# Altium PCB PCB1.PcbDoc
Units mil, origin at the board's own origin, x right, y up, seen from the top; angles counter-clockwise.
Board outline 2775 x 1765 mil, 2 copper layers (Top Layer, Bottom Layer); 45 components, 46 nets, 138 pads, 38 vias.
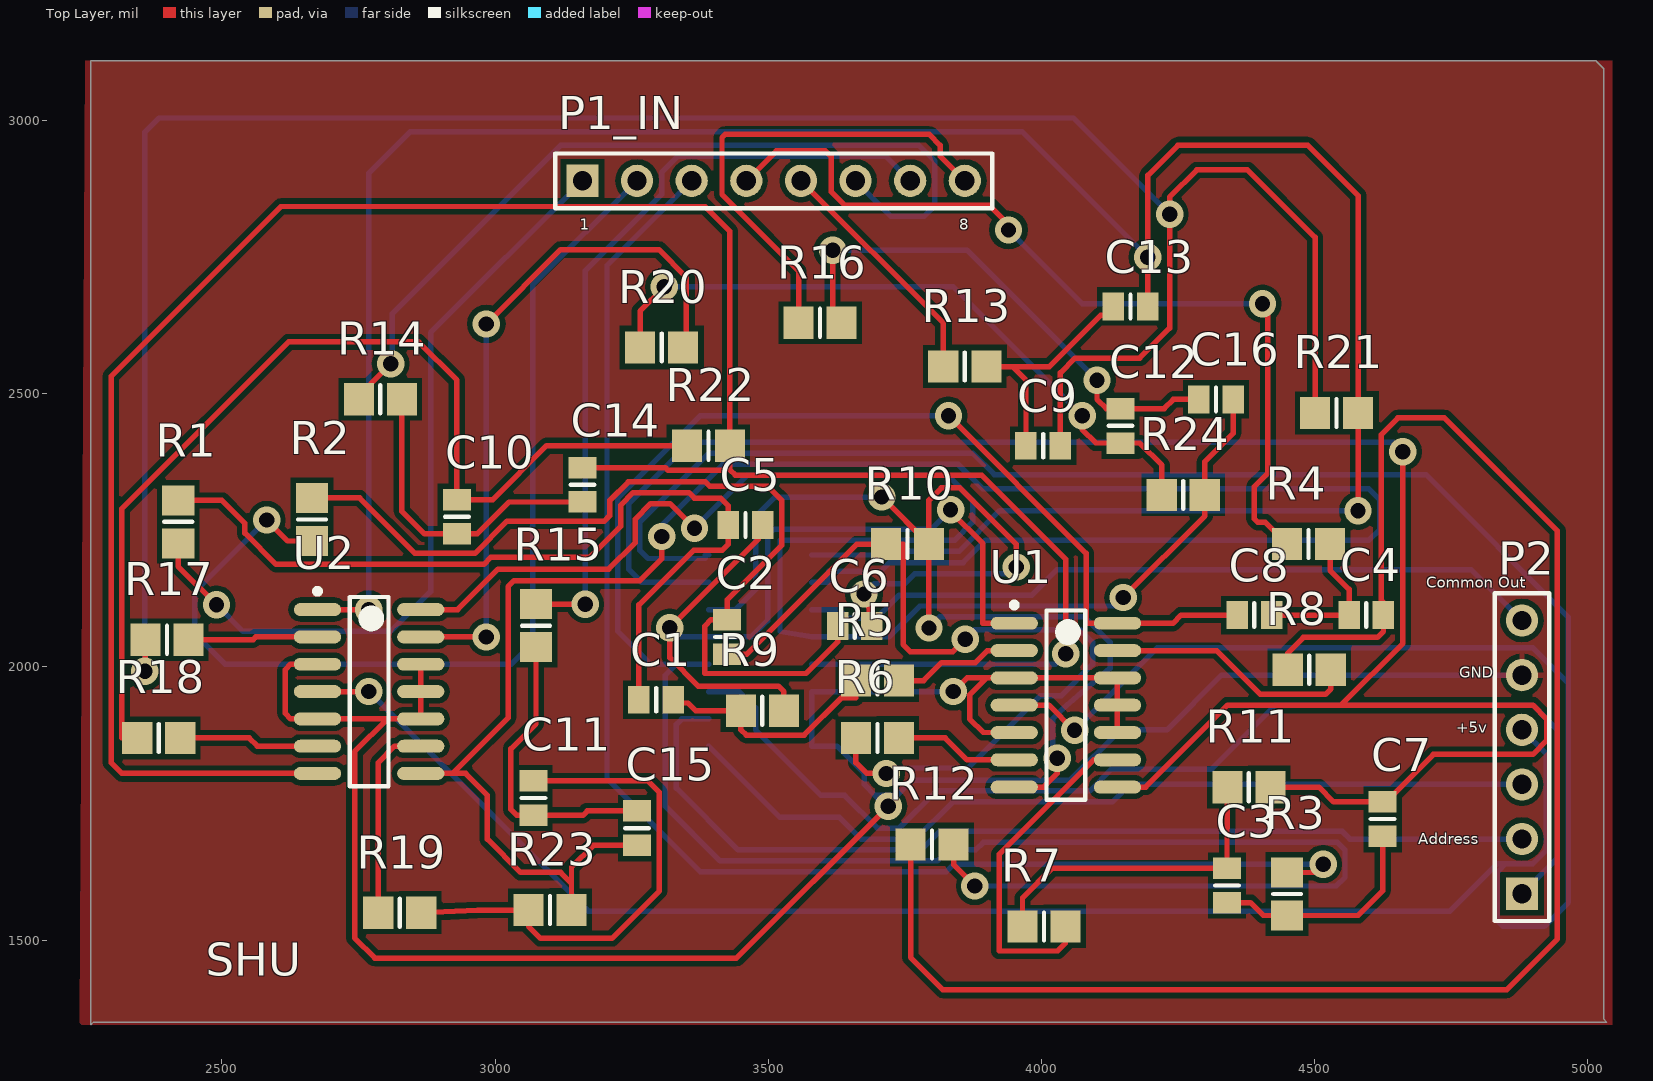
[diagram p0: Top Layer view]
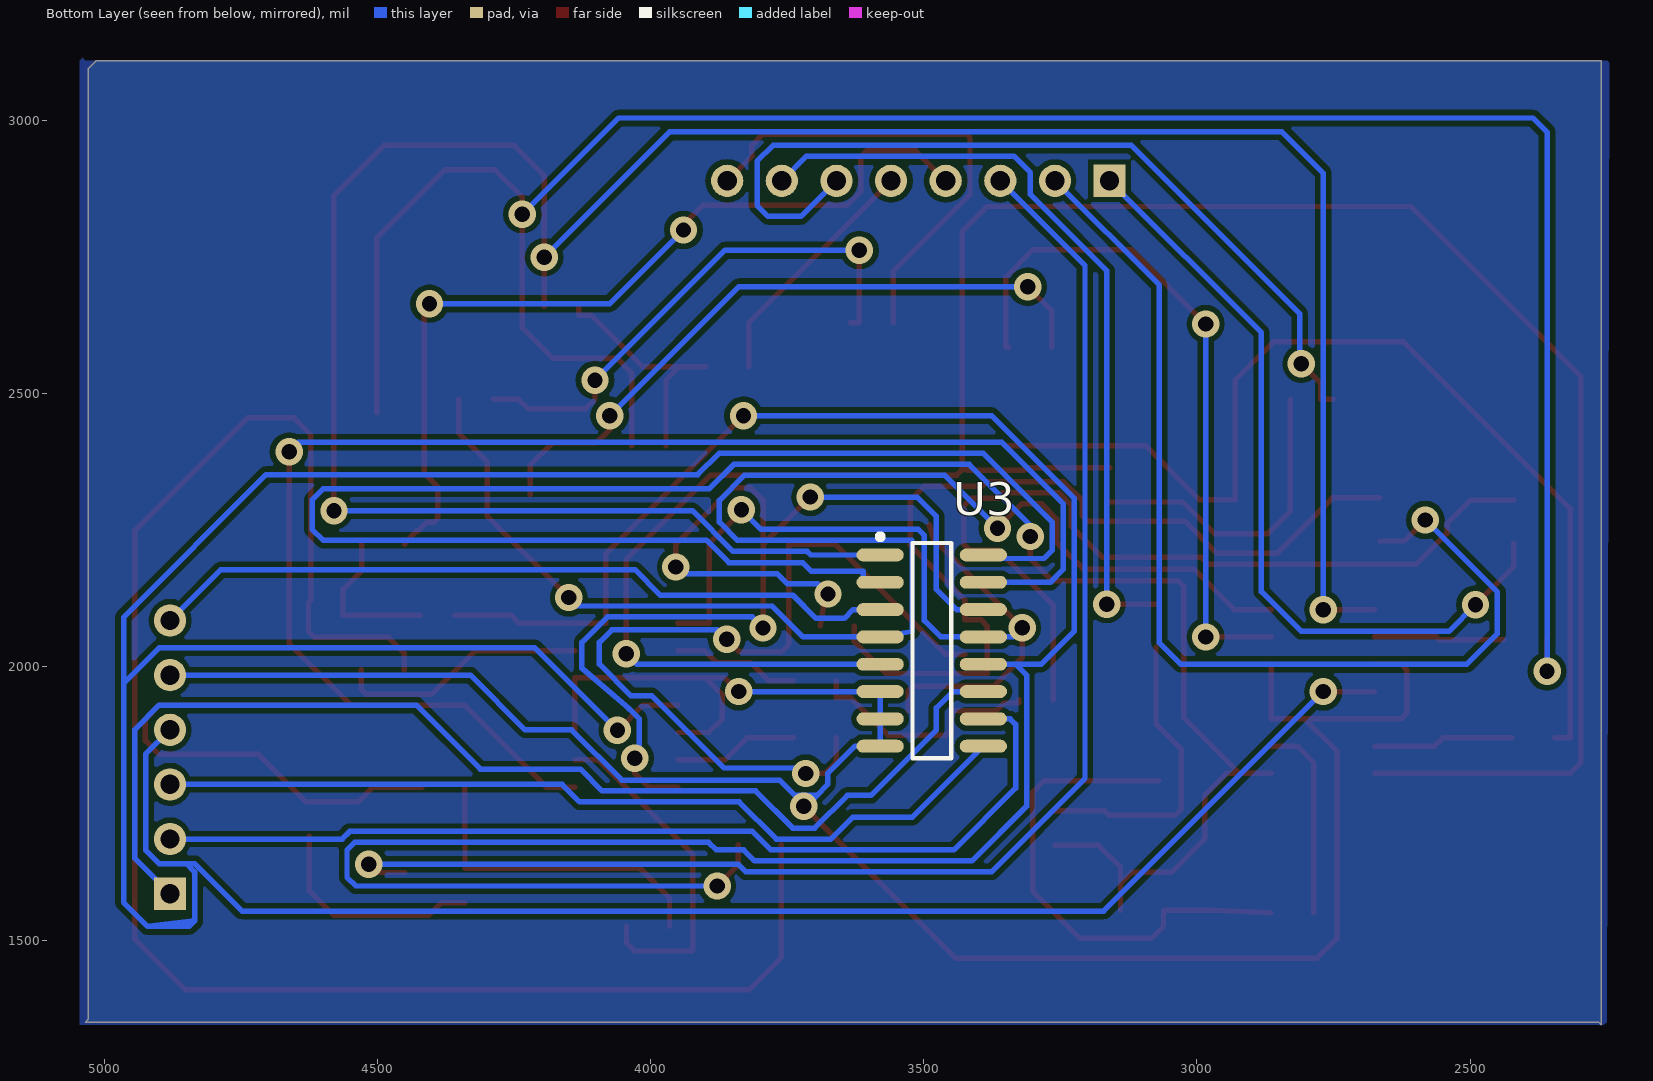
[diagram p1: Bottom Layer view, seen from below]

## Layer stack, top to bottom
Top Solder: solder mask 0.4, Solder Resist, Dk 3.5
Top Layer: signal copper 1.4
Dielectric 1: dielectric 12.6, FR-4, Dk 4.8
Bottom Layer: signal copper 1.4
Bottom Solder: solder mask 0.4, Solder Resist, Dk 3.5

## Board outline
2260,1345 2260,3110 5015,3110 5030,3095 5030,1355 5035,1350 2265,1350

## Design rules (kind name [scope] priority, off if disabled: settings)
Clearance [All] p1: gap=10 ignorepadtopadclearanceinfootprint=FALSE except(0: Arc-Hole Track-Hole SMDPad-Hole THPad-Hole Via-Hole Fill-Hole Poly-Hole Region-Hole Text-Hole)
PolygonConnect [All] p1: connectstyle=Relief reliefconductorwidth=10 reliefentries=4 polygonreliefangle="90 Angle" airgapwidth=10
RoutingVias [All] p1: holewidth=28 width=50 viastyle="Through Hole" minholewidth=28 minwidth=50 maxholewidth=28 maxwidth=50
SolderMaskExpansion [All] p1: expansion=4
Width [All] p1: maxlimit=10 minlimit=10 preferedwidth=10
30 further rules are at their usual default settings.

## Components (designator, comment, footprint, x,y, rotation, side; value= is the part's Value field where it differs from the comment)
C1 "220nF" 6-0805_L 3295,1940 r0 top
C2 "220nF" 6-0805_L 3425,2055 r270 top
C3 "220nF" 6-0805_L 4340,1600 r90 top
C4 "220nF" 6-0805_L 4595,2095 r0 top
C5 "1nF" 6-0805_L 3458.5,2260 r0 top
C6 "1nF" 6-0805_L 3658.5,2075 r0 top
C7 "1nF" 6-0805_L 4625,1721.5 r90 top
C8 "1nF" 6-0805_L 4390,2095 r180 top
C9 "220nF" 6-0805_L 4003.5,2405 r0 top
C10 "220nF" 6-0805_L 2930,2275 r90 top
C11 "220nF" 6-0805_L 3070,1760 r90 top
C12 "220nF" 6-0805_L 4145,2441.5 r270 top
C13 "1nF" 6-0805_L 4163.5,2660 r0 top
C14 "1nF" 6-0805_L 3160,2333.5 r90 top
C15 "1nF" 6-0805_L 3260,1705 r270 top
C16 "1nF" 6-0805_L 4320,2490 r0 top
P1_IN "Header 8" HDR1X8 3160,2890 r0 top (schematic designator P1)
P2 "Header 6" HDR1X6 4880,1585 r90 top
R1 "33" 6-0805_M 2420,2265.63 r90 top
R2 "33" 6-0805_M 2665,2270 r90 top
R3 "33" 6-0805_M 4450,1584.37 r270 top
R4 "33" 6-0805_M 4489.37,2225 r0 top
R5 "1K" 6-0805_M 3700,1975 r0 top
R6 "1K" 6-0805_M 3700,1870 r0 top
R7 "1K" 6-0805_M 4005,1525 r0 top
R8 "1K" 6-0805_M 4490.63,1995 r0 top
R9 "100M" 6-0805_M 3489.37,1920 r0 top
R10 "100M" 6-0805_M 3755,2225 r0 top
R11 "100M" 6-0805_M 4380,1780 r0 top
R12 "100M" 6-0805_M 3800,1675 r0 top
R13 "33" 6-0805_M 3860,2550 r0 top
R14 "33" 6-0805_M 2790,2490 r0 top
R15 "33" 6-0805_M 3075,2075.63 r270 top
R16 "33" 6-0805_M 3595,2630 r0 top
R17 "1K" 6-0805_M 2399.37,2050 r0 top
R18 "1K" 6-0805_M 2384.37,1870 r0 top
R19 "1K" 6-0805_M 2825.63,1550 r180 top
R20 "1K" 6-0805_M 3305,2585 r0 top
R21 "100M" 6-0805_M 4540.63,2465 r0 top
R22 "100M" 6-0805_M 3390.63,2405 r0 top
R23 "100M" 6-0805_M 3100.63,1555 r0 top
R24 "100M" 6-0805_M 4260,2315 r0 top
U1 "LM324ADR" D014_N 4045,1930 r0 top
U2 "LM324ADR" D014_N 2769.49,1955 r0 top
U3 "CD4051BCM" M16A_N 3485.51,2030 r180 bottom

## Footprints (in the part's own frame and the unit in brackets; to place one, negate y for a bottom-side part, rotate by r counter-clockwise, add the part's x,y. Pads: shape width x height; smd on the part's side, far side on the other; paste and mask are expansions set on the pad)
6-0805_L [mm] "Chip Resistor, Body 2.0x1.2mm, IPC High Density"
  rect 1x1.3 smd: 1(-0.8,0) 2(0.8,0)
  silkscreen extent 0,-0.55 0,0.55, body extent -1.07,-0.7 1.07,0.7, height 0.7
6-0805_M [mm] "Chip Resistor, Body 2.0x1.2mm, IPC Low Density"
  rect 1.4x1.5 smd: 1(-1,0) 2(1,0)
  silkscreen extent 0,-0.65 0,0.65, body extent -1.07,-0.7 1.07,0.7, height 0.7
D014_N [mm] "SOIC, 14-Leads, Body 8.7x3.9mm, Pitch 1.27mm, IPC Medium Density"
  oval 2.2x0.6 smd: 1(-2.4,3.81) 2(-2.4,2.54) 3(-2.4,1.27) 4(-2.4,0) 5(-2.4,-1.27) 6(-2.4,-2.54) 7(-2.4,-3.81) 8(2.4,-3.81) 9(2.4,-2.54) 10(2.4,-1.27) 11(2.4,0) 12(2.4,1.27) 13(2.4,2.54) 14(2.4,3.81)
  silkscreen extent -2.52,-4.4 0.9,4.78, body extent -2,-4.38 2,4.38, height 1.75
HDR1X6 [mm] "Connector; Header; 6 Position"
  rect 1.5x1.5 hole 0.9: 1(0,0)
  round 1.5 hole 0.9: 2(2.54,0) 3(5.08,0) 4(7.62,0) 5(10.16,0) 6(12.7,0)
  silkscreen extent -1.27,-1.27 13.97,1.27
HDR1X8 [mm] "Connector; Header; 8 Position"
  rect 1.5x1.5 hole 0.9: 1(0,0)
  round 1.5 hole 0.9: 2(2.54,0) 3(5.08,0) 4(7.62,0) 5(10.16,0) 6(12.7,0) 7(15.24,0) 8(17.78,0)
  silkscreen extent -1.27,-1.27 19.05,1.27
M16A_N [mm] "SOIC, 16-Leads, Body 9.9x3.9mm, Pitch 1.27mm, IPC Medium Density"
  oval 2.2x0.6 smd: 1(-2.4,4.445) 2(-2.4,3.175) 3(-2.4,1.905) 4(-2.4,0.635) 5(-2.4,-0.635) 6(-2.4,-1.905) 7(-2.4,-3.175) 8(-2.4,-4.445) 9(2.4,-4.445) 10(2.4,-3.175) 11(2.4,-1.905) 12(2.4,-0.635) 13(2.4,0.635) 14(2.4,1.905) 15(2.4,3.175) 16(2.4,4.445)
  silkscreen extent -2.53,-5 0.9,5.42, body extent -2,-5 2,5, height 1.75

## Part data
C1 C2 C3 C4 C5 C6 C7 C8 C9 C10 C11 C12 C13 C14 C15 C16: library part CAP, "电容"
P1_IN: "Header, 8-Pin", LatestRevisionDate=17-Jul-2002, LatestRevisionNote="Re-released for DXP Platform.", Publisher="Altium Limited"
P2: "Header, 6-Pin", LatestRevisionDate=17-Jul-2002, LatestRevisionNote="Re-released for DXP Platform.", Publisher="Altium Limited"
R1 R2 R3 R4 R5 R6 R7 R8 R9 R10 R11 R12 R13 R14 R15 R16 R17 R18 R19 R20 R21 R22 R23 R24: library part RES, "电阻"
U1 U2: "Quadruple Operational Amplifier", Code_IPC=SOIC127P600-14, ComponentLink1Description="Manufacturer Link", ComponentLink1URL=http://www.ti.com/, ComponentLink2Description=Datasheet, ComponentLink2URL=http://www-s.ti.com/sc/ds/lm324.pdf, DatasheetVersion=Jan-1989, LatestRevisionDate=13-Apr-2006, LatestRevisionNote="IPC-7351 Footprint Added.", PackageDescription="14-Pin Small Outline Integrated Circuit 1.27 mm Pitch", PackageReference=D014, PackageVersion=Jan-1998, Published=15-Apr-2002, Publisher="Altium Limited"
U3: "8-Channel Analog Multiplexer/Demultiplexer", Code_IPC=SOIC127P600-16, ComponentLink1Description="Manufacturer Link", ComponentLink1URL=http://www.fairchildsemi.com/, ComponentLink2Description=Datasheet, ComponentLink2URL=http://www.fairchildsemi.com/ds/CD%2FCD4052BC.pdf, DatasheetVersion=Jan-1999, LatestRevisionDate=13-Apr-2006, LatestRevisionNote="IPC-7351 Footprint Added.", PackageDescription="16-Pin Small Outline Integrated Circuit 1.27 mm Pitch", PackageReference=M16A, PackageVersion=2000, Published=17-Jul-2002, Publisher="Altium Limited"

## Via types
v1: diameter 50, hole 28, Top Layer to Bottom Layer, 38 vias

## Nets (pads, with @x,y where several pads share a name; then routed paths per layer and width w, separated by ;. In a path a pad name is that pad's centre, name@x,y a point inside that pad or via, vN(x,y) a via of type N, cw(c..) or ccw(c..) an arc to the next point about the centre after c; other vN are vias at no path point)
+5: 
Address_A: 
Address_B: 
Address_C: 
Channel_1: 
Channel_2: 
Channel_3: 
Channel_4: 
Channel_5: 
Channel_6: 
Channel_7: 
Channel_8: 
Common_Out: 
GND: P2.5
In_1: 
In_2: 
In_3: 
In_4: 
In_5: 
In_6: 
In_7: 
In_8: 
NetC1_1: 
NetC1_2: 
NetC2_1: 
NetC2_2: 
NetC3_1: 
NetC3_2: 
NetC4_1: 
NetC4_2: 
NetC9_1: 
NetC9_2: 
NetC10_1: 
NetC10_2: 
NetC11_1: 
NetC11_2: 
NetC12_1: 
NetC12_2: 
NetR5_2: 
NetR6_2: 
NetR7_2: 
NetR8_2: 
NetR17_2: 
NetR18_2: 
NetR19_2: 
NetR20_2: 
pads on no net: C1.1 C1.2 C2.1 C2.2 C3.1 C3.2 C4.1 C4.2 C5.1 C5.2 C6.1 C6.2 C7.1 C7.2 C8.1 C8.2 C9.1 C9.2 C10.1 C10.2 C11.1 C11.2 C12.1 C12.2 C13.1 C13.2 C14.1 C14.2 C15.1 C15.2 C16.1 C16.2 P1_IN.1 P1_IN.2 P1_IN.3 P1_IN.4 P1_IN.5 P1_IN.6 P1_IN.7 P1_IN.8 P2.1 P2.2 P2.3 P2.4 P2.6 R1.1 R1.2 R2.1 R2.2 R3.1 R3.2 R4.1 R4.2 R5.1 R5.2 R6.1 R6.2 R7.1 R7.2 R8.1 R8.2 R9.1 R9.2 R10.1 R10.2 R11.1 R11.2 R12.1 R12.2 R13.1 R13.2 R14.1 R14.2 R15.1 R15.2 R16.1 R16.2 R17.1 R17.2 R18.1 R18.2 R19.1 R19.2 R20.1 R20.2 R21.1 R21.2 R22.1 R22.2 R23.1 R23.2 R24.1 R24.2 U1.1 U1.2 U1.3 U1.4 U1.5 U1.6 U1.7 U1.8 U1.9 U1.10 U1.11 U1.12 U1.13 U1.14 U2.1 U2.2 U2.3 U2.4 U2.5 U2.6 U2.7 U2.8 U2.9 U2.10 U2.11 U2.12 U2.13 U2.14 U3.1 U3.2 U3.3 U3.4 U3.5 U3.6 U3.7 U3.8 U3.9 U3.10 U3.11 U3.12 U3.13 U3.14 U3.15 U3.16
copper on no net: | length 82168.9
  Top Layer w10: 2345,1870 2317,1870 2317,2290 2622,2595 2860,2595 2930,2525 2930,2306.5 2996,2306.5 3094.5,2405 3351.26,2405 ; v1(2359,1992) 2360,1993 2360,2050 ; 2420,2226.26 2420,2184 v1(2490,2114) ; 2420,2305 2500,2305 2542,2263 2542,2245 2599,2188 2979.57,2188 2992.07,2200.5 3173.18,2200.5 3230.34,2257.66 3230.34,2296.34 3253,2319 3355,2319 3365,2309 3413.01,2309 3427.01,2295 3427.01,2260 3427.01,2225 3416.01,2214 3363.99,2214 3263.5,2113.51 3263.5,1940 ; 2423.74,1870 2550,1870 2565,1855 2675,1855 ; 2438.74,2050 2557,2050 2562,2055 2675,2055 ; v1(2582,2269) 2620.37,2230.63 2665,2230.63 ; 2665,2309.37 2752,2309.37 2853.37,2208 2963,2208 3022,2267 3200,2267 3210,2277 3210,2305 3244,2339 3385,2339 3393,2331 3499,2331 3525,2305 3525,2223 3425,2123 3425,2086.5 3395.5,2086.5 3384,2075 3384,1988 3569.01,1988 3627.01,2046 3627.01,2075 ; 2675,1805 2317,1805 2297,1825 2297,2532 2608,2843 3384.46,2843 3430,2797.46 3430,2405 3430,2370 ; 2675,1955 v1(2769,1955) ; 2675,2005 2626,2005 2616,1995 2616,1915 2626,1905 2675,1905 2803,1905 ; 2675,2105 v1(2769,2105) ; 2750.63,2490 2773,2490 2773,2519 v1(2809,2555) ; 2786.26,1550 2786.26,1825 2816.26,1855 2863.98,1855 ; 2829.37,2490 2829.37,2285 2870.87,2243.5 2930,2243.5 2967.08,2243.5 3025.58,2302.01 3160,2302.01 ; 2863.98,1805 2922,1805 ; 2863.98,2005 2863.98,1955 2863.98,1905 2803,1905 ; 2863.98,2055 v1(2984,2055) ; 2863.98,2105 2931.6,2105 3005.62,2179.03 3208.03,2179.03 3256.32,2227.32 3256.32,2270.32 3285,2299 3320,2299 v1(3365,2254) ; 2865,1550 2968,1555 3061.26,1555 3061.26,1525 3083.26,1503 3214,1503 3301,1590 3301,1770.5 3280,1791.5 3070,1791.5 ; v1(2984,2628) 3120,2764 3300,2764 3350,2714 3350,2585 3344.37,2585 ; 3075,2036.26 3075,1896 3029,1850 3029,1739.5 3040,1728.5 3070,1728.5 3161,1728.5 3168.99,1736.5 3260,1736.5 ; 3075,2115 v1(3165,2115) ; 3140,1555 3140,1604 ; 3160,2365 3312,2365 3317,2360 3420,2360 3430,2370 ; 3260,1673.5 3180,1673.5 3140,1633.5 3140,1604 ; 3265.63,2585 3265.63,2651.63 v1(3310,2696) ; v1(3305,2239) 3305,2198 3265,2158 3035,2158 3024,2147 3024,1907 2922,1805 ; 3326.5,1940 3326.5,1934 3353,1934 3367,1920 3450,1920 3450,1885 3460,1875 3566,1875 3634.63,1943.63 3660.63,1943.63 3660.63,1975 ; 3425,2023.5 3461,2023.5 3662.5,2225 3715.63,2225 3747,2225 3747,2041.11 3760,2028.11 3838.11,2028.11 v1(3861,2051) ; 3460,2890 3515,2945 3605,2945 3615.47,2934.53 3615.47,2870 3640,2845.47 3904.53,2845.47 3940,2810 v1(3940,2800) ; 3490,2260 3482,2234 v1(3320,2072) 3320,2017 3372,1965 3518.74,1965 3528.74,1955 3528.74,1920 ; 3555.63,2630 3555.63,2724.84 3415.47,2865 3415.47,2969.14 3421.33,2975 3795,2975 3815,2955 3815,2935 3860,2890 ; 3560,2890 3820.63,2629.37 3820.63,2550 ; v1(3618,2763) 3618,2630 3634.37,2630 ; 3660.63,1870 3660.63,1825 3680.63,1805 v1(3716,1805) ; v1(3675.5,2133.5) 3680,2133.5 3690,2075 ; v1(3708,2311) 3794,2225 ; v1(3720,1745) 3442,1467 2780,1467 2743,1504 2743,1845 2803,1905 ; 3739.37,1870 3824,1870 3864,1830 3950.51,1830 ; 3739.37,1975 3784.63,1975 3817.74,2008.11 3879.6,2008.11 3901.49,2030 3950.51,2030 ; 3760.63,1675 3760.63,1468.37 3820,1409 4852,1409 4945,1502 4945,2249 4738,2456 4653,2456 4622,2425 4622,2122.5 4626.5,2118 4626.5,2095 4626.5,2065 4615.5,2054 4480,2054 4451.26,2025.26 4451.26,1995 ; v1(3794.37,2071.48) 3794.37,2225 3794,2225 ; v1(3830,2460) 4082,2208 4082,2080 4139.49,2080 4241,2080 4256,2095 4358.5,2095 ; v1(3834,2288) 3834,2285 3893,2226 3893,2080 3950.51,2080 ; v1(3839,1955) 3864,1980 3900,1980 ; 3839.37,1675 3839.37,1638 v1(3878.37,1599) ; 3899.37,2550 3947.01,2550 ; 3950.51,1780 4004,1780 4029,1805 v1(4029,1833) ; 3950.51,1880 3894,1880 3869,1905 3869,1949 3900,1980 ; 3950.51,1930 4014,1930 4060,1884 v1(4061,1884) ; v1(3954,2183) 3954,2225 3851,2328 3817,2328 3794,2305 3794,2225 ; 3965.63,1525 3965.63,1577.13 4020,1631.5 4340,1631.5 4340,1705 4340.63,1705.63 4340.63,1780 ; 3972.01,2405 3972.01,2525 3947.01,2550 ; 4035,2405 4035,2538.32 4062.05,2565.37 4180,2565.37 4235,2620.37 v1(4235,2829) 4235,2860 4285,2910 4377.52,2910 4501.26,2786.26 4501.26,2465 ; 4044.37,1525 4044.37,1494.37 4030,1480 3923,1480 3923,1657 4096,1830 4139.49,1830 ; v1(4045,2024) 4045,2197 3891,2351 3440,2351 3430,2361 3430,2370 ; v1(4075,2460) 4075,2435 4100,2410 4145,2410 4180,2410 4220.63,2369.37 4220.63,2315 ; v1(4102,2525) 4102,2489.99 4119,2472.99 4145,2472.99 4224.9,2472.99 4241.91,2490 4288.5,2490 ; 4132.01,2660 4132.01,2644 4109,2644 4015,2550 3947.01,2550 ; 4139.49,1780 4191,1780 4341,1930 4549,1930 ; 4139.49,1880 4139.49,1930 4139.49,1980 3950.51,1980 3900,1980 ; 4139.49,2030 4321,2030 4401,1950 4520,1950 4530,1960 4530,1995 ; v1(4150,2127) 4299.37,2276.37 4299.37,2315 4299.37,2376 4351.5,2428.13 4351.5,2490 ; 4195,2660 v1(4195,2750) 4195,2900 4250,2955 4488,2955 4580,2863 4580,2465 v1(4580,2286) ; 4340,1568.5 4383,1568.5 4406.5,1545 4450,1545 4580,1545 4625,1590 4625,1690 ; v1(4405,2665) 4409.14,2665 4415,2659.14 4415,2355 4390,2330 4390,2270.86 4395.86,2265 4410,2265 4425.47,2249.53 4427.44,2249.53 4450,2226.97 4450,2225 ; 4419.37,1780 4508,1780 4535.01,1752.99 4625,1752.99 4631,1752.99 4718.01,1840 4900,1840 4925,1865 4925,1905 4900,1930 4549,1930 ; 4421.5,2095 4563.5,2095 4563.5,2142 4528.74,2176.76 4528.74,2225 ; 4450,1623.74 4500.74,1623.74 v1(4516,1639) ; v1(4662,2394) 4662,2043 4549,1930 ; 2922,1805 2946,1805 2986,1765 2986,1685 3047,1624 3120,1624 3140,1604
  Bottom Layer w10: v1(2359,1992) 2359,2979 2385,3005 4059,3005 v1(4235,2829) ; v1(2490,2114) 2539,2065 2809,2065 2882,2138 2882,2612 3160,2890 ; v1(2582,2269) 2450,2137 2450,2061 2506,2005 3030,2005 3069,2044 3069,2699 3260,2890 ; v1(2769,1955) 3171,1553 4748,1553 4835,1640 4850,1640 ; v1(2769,2105) 2769,2904 2845,2980 3965,2980 v1(4195,2750) ; v1(2809,2555) 2812,2558 2812,2647 3120,2955 3776,2955 3805,2926 3805,2845 3785,2825 3725,2825 3660,2890 ; v1(2984,2055) v1(2984,2628) ; v1(3165,2115) 3165,2725 3305,2865 3305,2905 3335,2935 3715,2935 3760,2890 ; v1(3305,2239) 3305,2259 3417,2371 3848,2371 3893,2326 4600,2326 4620,2306 4620,2252 4600,2232 3897.94,2232 3856.94,2191 3722,2191 3706,2175 3611,2175 3611,2155 3580,2155 ; v1(3310,2696) 3839,2696 v1(4075,2460) ; v1(3320,2072) 3337,2055 3391.02,2055 3469,2055 3499,2085 3499,2241 3510,2252 3798,2252 v1(3834,2288) ; 3360,2890 3205,2735 3205,1795.88 3375.88,1625 3826,1625 3840,1639 v1(4516,1639) ; v1(3365,2254) 3462,2351 3828.37,2351 3874.37,2305 3874.37,2265 3841.18,2231.81 3521.69,2231.81 3521.69,2065 3580,2055 3721,2055 3777.58,2111.58 4134.58,2111.58 v1(4150,2127) ; 3391.02,1855 3521.02,1725 3630,1725 3670,1685 3770,1685 3838,1753 4130,1753 4162,1785 4880,1785 ; 3391.02,1905 3342,1905 3332,1895 3332,1778 3445,1665 3780,1665 3814,1699 4551,1699 4565,1685 4880,1685 ; 3391.02,1955 3447,1955 3477,1925 3477,1885 3597,1765 3640,1765 3700,1705 3740,1705 3808,1773 4089,1773 4128.9,1812.9 4311.9,1812.9 4429,1930 4900,1930 4944.53,1885.47 4944.53,1649.53 4880,1585 ; 3391.02,2005 3332,2005 ; 3391.02,2105 3440,2105 3477,2142 3477,2275.79 3512.21,2311 v1(3708,2311) ; 3391.02,2155 3268.59,2155 3245,2178.59 3245,2299 3357,2411 4645,2411 v1(4662,2394) ; 3391.02,2205 3385,2205 3385,2198.59 3280,2198.59 3265,2213.59 3265,2265 3391,2391 3875,2391 3914,2352 4704,2352 4965,2091 4965,1970 ; 3580,2005 4026,2005 v1(4045,2024) ; 3580,2105 3629.5,2105 3645.5,2089 3697.42,2089 3740,2131.58 3982.58,2131.58 4029,2178 4787,2178 4880,2085 ; 3580,2205 3707,2205 3713.58,2211.58 3849.23,2211.58 3923.66,2286 v1(4580,2286) ; v1(3618,2763) 3864,2763 v1(4102,2525) ; v1(3675.5,2133.5) 3694,2152 3750,2152 3768.79,2170.79 3954,2170.79 v1(3954,2183) ; v1(3716,1805) 3726,1815 3865.75,1815 3997.91,1947.17 4036.17,1947.17 4094,2005 4094,2045 4071,2068 3878,2068 v1(3861,2051) ; v1(3720,1745) 3716,1745 3696,1765 ; v1(3794.37,2071.48) 3814.47,2091.58 4079.42,2091.58 4126,2045 4126,1997.73 4039.9,1923.9 4021,1905 4021,1841 v1(4029,1833) ; v1(3830,2460) 3376,2460 3225,2309 3225,2065 3285,2005 3332,2005 ; v1(3839,1955) 3580,1955 3580,1905 3580,1855 3626,1855 3676,1805 3676,1785 3696,1765 ; v1(3878.37,1599) 4540,1599 4556,1615 4556,1665 4542,1679 3894,1679 3880,1665 3830,1665 3810,1645 3412,1645 3312,1745 3312,1985 3332,2005 ; v1(3940,2800) 4075,2665 v1(4405,2665) ; v1(4061,1884) 4212,2035 4900,2035 4965,1970 ; 4880,1885 4924.53,1840.47 4924.53,1664.53 4900,1640 4850,1640 ; 4880,1985 4330,1985 4230,1885 4145,1885 4053,1793 3764,1793 3736,1765 3696,1765 ; 4835,1535 4845,1525 4921,1525 ; 4835,1535 4921,1525 ; 4835,1535 4835,1625 4850,1640 ; 4921,1525 4965,1569 4965,1970

## Polygon pours and split planes (outlines as drawn)
GND on Bottom Layer "Bottom Layer-GND" (solid, pour order 36): 2245,3110 5035,3110 5040,3115 5045,3110 5045,1345 2255,1345 2250,1350
no net on Bottom Layer "Bottom Layer-No Net" (solid, pour order 32): 2255,2975
no net on Bottom Layer "Bottom Layer-No Net 1" (solid, pour order 30): 2275,2970
no net on Bottom Layer "Bottom Layer-No Net 2" (solid, pour order 28): 2255,3025
no net on Bottom Layer "Bottom Layer-No Net 3" (solid, remove dead copper, pour order 26): 5340,2545
GND on Top Layer "Top Layer-GND" (solid, pour order 34): 2250,3110 5045,3110 5045,1345 2240,1345

## Silkscreen, mask and mechanical layers (free items; w line width, h text height)
Top Overlay:
  text "1" at 3155,2800 h20
  text "8" at 3850,2800 h20
  text "Common Out" at 4705,2145 h20
  text "GND" at 4765,1980 h20
  text "+5v" at 4760,1880 h20
  text "Address" at 4690,1675 h20
  text "SHU" at 2470,1435 h60
Mechanical 1:
  lines w10: 2260,1345 2265,1350 ; 2260,1345 2260,3110 ; 2260,1345 2265,1350 ; 2260,1345 2260,3110 ; 2260,3110 5015,3110 ; 2260,3110 5015,3110 ; 2265,1350 5035,1350 ; 2265,1350 5035,1350 ; 5015,3110 5030,3095 ; 5015,3110 5030,3095 ; 5030,1355 5035,1350 ; 5030,1355 5030,3095 ; 5030,1355 5030,3095 ; 5030,1355 5035,1350